# Altium PCB CtoMicroOTG.X1.PcbDoc
Units mm, origin at the board's own origin, x right, y up, seen from the top; angles counter-clockwise.
Board outline 26.75 x 25.4 mm, 2 copper layers (Top Layer, Bottom Layer), stack 0.427 mm thick; 3 components, 5 nets, 44 pads, 2 vias.
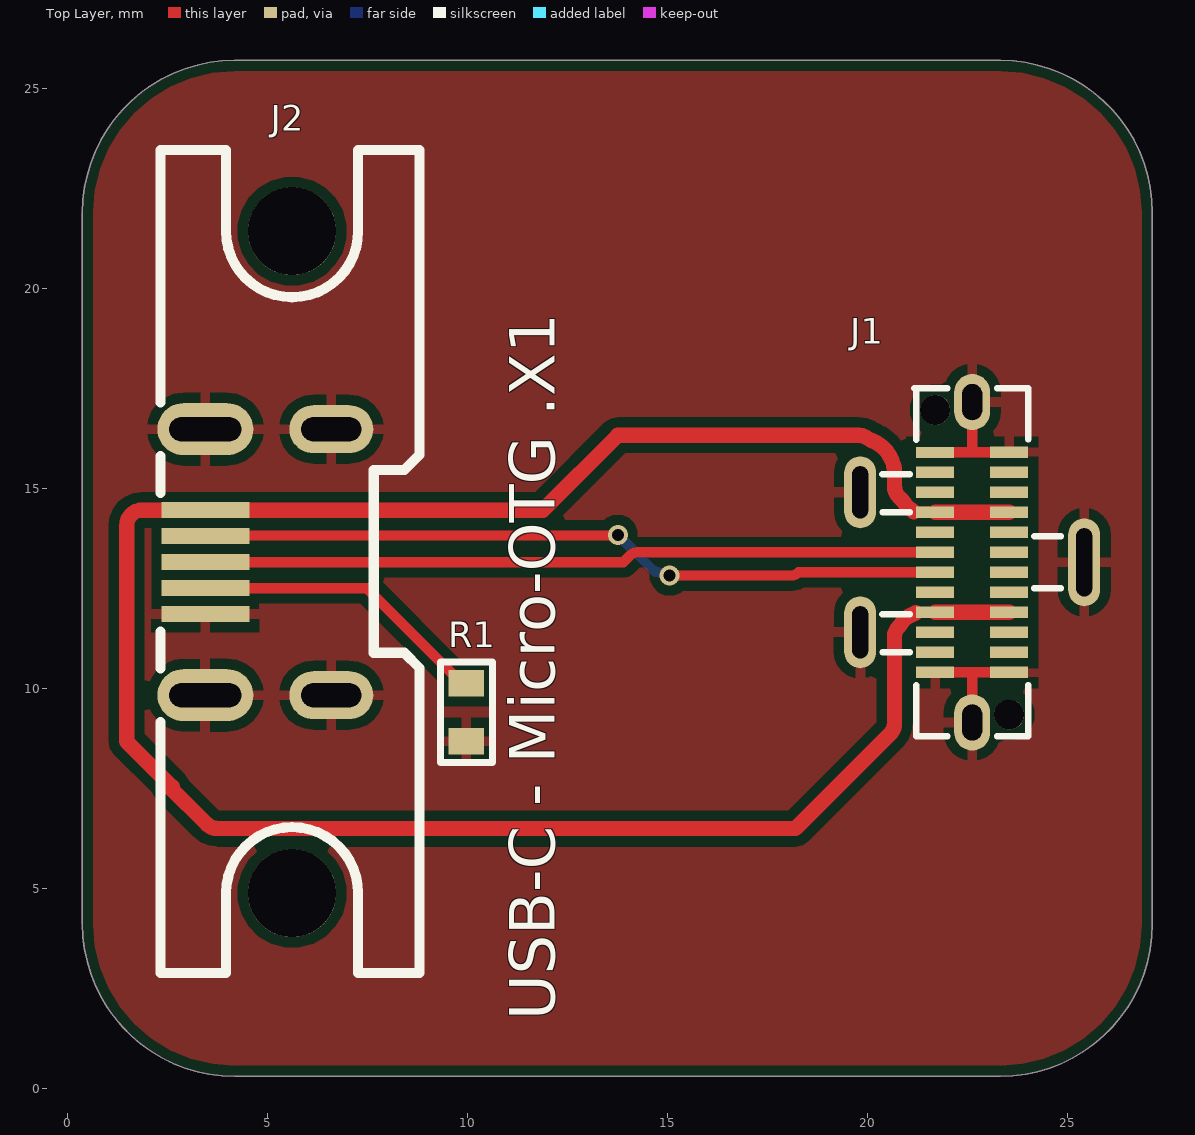
[diagram p0: Top Layer view]
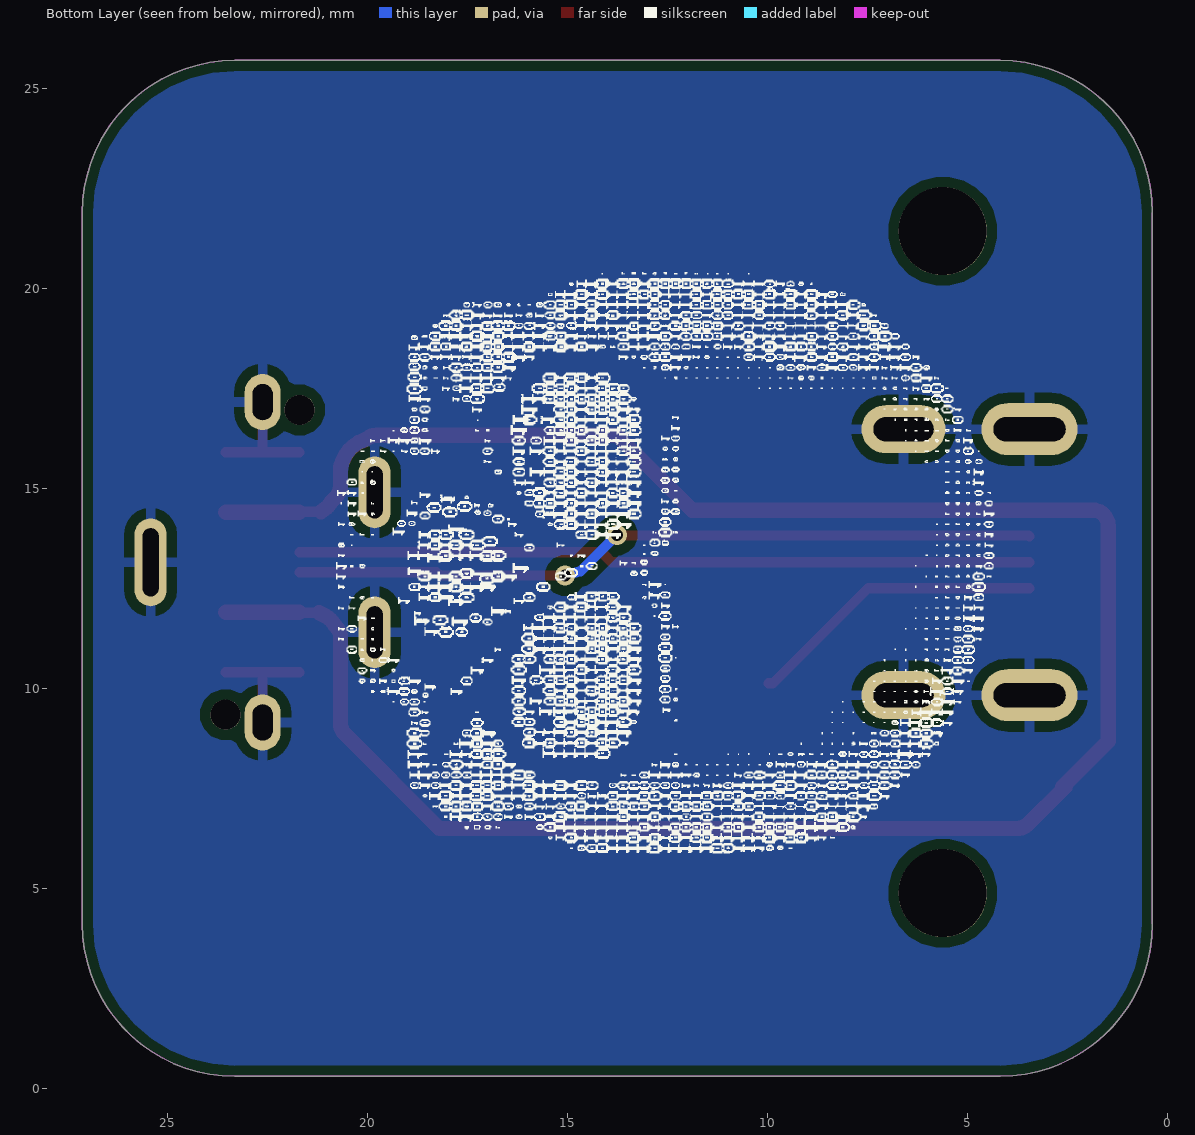
[diagram p1: Bottom Layer view, seen from below]

## Layer stack, top to bottom
Top Solder: solder mask 0.0102, Solder Resist, Dk 3.5
Top Layer: signal copper 0.0356
Dielectric 1: core 0.3556, Core-025, Dk 4.7
Bottom Layer: signal copper 0.0356
Bottom Solder: solder mask 0.0102, Solder Resist, Dk 3.5

## Board outline
0.381,4.115 0.381,21.895 cw(c4.191,21.895) 4.191,25.705 23.323,25.705 cw(c23.323,21.895) 27.133,21.895 27.133,4.115 cw(c23.323,4.115) 23.323,0.305 4.191,0.305 cw(c4.191,4.115)

## Design rules (kind name [scope] priority, off if disabled: settings)
Clearance Clearance_DiffPairs [InDifferentialPairClass('All Differential Pairs')] p1: gap=0.102 ignorepadtopadclearanceinfootprint=FALSE except(0.508: Arc-Fill Arc-Poly Arc-Region Track-Fill Track-Poly Track-Region SMDPad-Fill SMDPad-Poly SMDPad-Region THPad-Fill THPad-Poly THPad-Region Via-Fill Via-Poly Via-Region Fill-Fill Fill-Poly Fill-Region Poly-Poly Poly-Region Region-Region)
Clearance [All] p2: gap=0.254 ignorepadtopadclearanceinfootprint=FALSE except(0: Arc-Hole Track-Hole SMDPad-Hole THPad-Hole Via-Hole Fill-Hole Poly-Hole Region-Hole Text-Hole; 0.127: Arc-SMDPad Track-SMDPad SMDPad-SMDPad; 0.178: Arc-Arc Arc-Track Track-Track; 0.203: Arc-Via Track-Via SMDPad-Via THPad-Via Via-Via)
DiffPairsRouting [InDifferentialPairClass('All Differential Pairs')] p1: maxlimit=0.127 minlimit=0.127 mostfreqgap=0.127 toplayer_minwidth=0.203 toplayer_maxwidth=0.381 toplayer_prefwidth=0.254 bottomlayer_minwidth=0.203 bottomlayer_maxwidth=0.381 bottomlayer_prefwidth=0.254 maxuncoupledlength=12.7
MatchedLengths [All] p1: tolerance=0.254 checknetsindiffpair=TRUE checkdiffpairvsdiffpair=FALSE checkxsignals=FALSE checkothers=FALSE
PolygonConnect [All] p1: thpad.connectstyle=Relief thpad.reliefconductorwidth=0.254 thpad.reliefentries=4 thpad.polygonreliefangle="90 Angle" thpad.airgapwidth=0.254 smdpad.connectstyle=Relief smdpad.reliefconductorwidth=0.254 smdpad.reliefentries=4 smdpad.polygonreliefangle="90 Angle" smdpad.airgapwidth=0.254 via.connectstyle=Direct via.reliefconductorwidth=0.254 via.reliefentries=4 via.polygonreliefangle="90 Angle" via.airgapwidth=0.254
RoutingVias [All] p1: holewidth=0.203 width=0.406 viastyle="Through Hole" minholewidth=0.203 minwidth=0.406 maxholewidth=5.08 maxwidth=1.27
SilkToSilkClearance [All] p1: silktosilkclearance=0.127
SilkToSolderMaskClearance [IsPad] p1: minsilkscreentomaskgap=0.025 clearancetoexposedcopper=TRUE
SolderMaskExpansion [All] p1: expansion=0.102 istentingtop=FALSE
Width [All] p1: maxlimit=1.524 minlimit=0.226 preferedwidth=0.254 minimp=50.000000 maximp=50.000000 favimp=50.000000
27 further rules are at their usual default settings.

## Components (designator, comment, footprint, x,y, rotation, side; value= is the part's Value field where it differs from the comment)
J1 "3A 1 Brick nogging USB-C male" USB-309GD 22.627,13.157 r180 top
J2 "SMD MicroUSB-Male" ZX80-B-5SA(30) 5.029,13.16 r270 top
R1 "Generic Resistor" 0603 9.982,10.135 r270 top value=0

## Footprints (in the part's own frame and the unit in brackets; to place one, negate y for a bottom-side part, rotate by r counter-clockwise, add the part's x,y. Pads: shape width x height; smd on the part's side, far side on the other; paste and mask are expansions set on the pad)
0603 [mil] "Common Chip Resistor 0603 (1608 Metric)"
  rect 26x35 smd: 1(0,0) 2(57,0)
  silkscreen extent -21,-26 78,26, body extent -2,-16 59,16, height 17
USB-309GD [mm] "Brick nogging USB-C male"
  rect 0.95x0.28 smd paste-100 mask+0.051: A1(0.925,-2.748) A2(0.925,-2.25) A3(0.925,-1.75) A4(0.925,-1.25) A5(0.925,-0.75) A6(0.925,-0.25) A7(0.925,0.25) A8(0.925,0.75) A9(0.925,1.25) A10(0.925,1.75) A11(0.925,2.25) A12(0.925,2.75) B1(-0.925,2.75) B2(-0.925,2.25) B3(-0.925,1.75) B4(-0.925,1.25) B5(-0.925,0.75) B6(-0.925,0.25) B7(-0.925,-0.25) B8(-0.925,-0.75) B9(-0.925,-1.25) B10(-0.925,-1.75) B11(-0.925,-2.25) B12(-0.925,-2.75)
  oval 0.9x1.4 hole 0.5 slot 0.9 at 90 deg paste+0 mask+0.051: G1(0,-4.005) G3(0,4.005)
  oval 0.8x2.2 hole 0.4 slot 1.7 at 90 deg paste+0 mask+0.051: G2(-2.8,0)
  oval 0.8x1.8 hole 0.4 slot 1.3 at 90 deg paste+0 mask+0.051: G4(2.8,1.75) G5(2.8,-1.75)
  round 0.75 hole 0.75 unplated paste+0: ""(-0.925,3.81) ""(0.925,-3.81)
  silkscreen extent -2.22,-4.35 2.25,4.35
ZX80-B-5SA(30) [mm] "USB 2.0 1 5P Male -30?~+85? Micro-B Male SMD"
  rect 0.4x2.2 smd paste-100 mask+0.05: 1(-1.3,-1.575) 2(-0.65,-1.575) 3(0,-1.575) 4(0.65,-1.575) 5(1.3,-1.575)
  oval 1.3x2.4 hole 0.6 slot 1.8 at 90 deg paste+0 mask+0.051: 6(3.325,-1.575) 7(-3.325,-1.575)
  oval 1.2x2.1 hole 0.6 slot 1.5 at 90 deg paste+0 mask+0.051: 8(-3.325,1.575) 9(3.325,1.575)
  round 2.2 hole 2.2 unplated paste+0: ""(-8.275,0.595) ""(8.275,0.595)
  silkscreen extent -10.31,-2.7 10.27,3.78, body extent -10.28,-2.48 10.28,3.82, height 13

## Part data
J1: library part USB-309GD, "3A 1 Brick nogging 24P male -20℃~+60℃ Type-C SMD USB Connector", LCSC PN=C309337
J2: library part ZX80-B-5SA(30), "USB 2.0 1 5P Male -30℃~+85℃ Micro-B SMD USB Connector", LCSC PN=C598212
R1: Power=1/10W

## Via types
v1: diameter 0.5, hole 0.3, Top Layer to Bottom Layer, 2 vias

## Nets (pads, with @x,y where several pads share a name; then routed paths per layer and width w, separated by ;. In a path a pad name is that pad's centre, name@x,y a point inside that pad or via, vN(x,y) a via of type N, cw(c..) or ccw(c..) an arc to the next point about the centre after c; other vN are vias at no path point)
DN: J1.A7 J2.2 | length 18.7
  Top Layer w0.254: J2.2 3.471,13.826 13.75,13.826 v1(13.767,13.843) ; v1(15.062,12.827) 18.101,12.827 ccw(c18.101,13.081) 18.281,12.902 18.286,12.907 J1.A7
  Bottom Layer w0.254: v1(13.767,13.843) 14.685,12.925 cw(c14.685,12.671) 14.755,12.915 v1(15.062,12.827)
DP: J1.A6 J2.3 | length 18.3
  Top Layer w0.254: J2.3 13.904,13.16 14.077,13.333 cw(c14.257,13.153) 14.257,13.407 21.367,13.407 J1.A6
GND: J1.A1 J1.A12 J1.B1 J1.B12 J1.G1 J1.G2 J1.G3 J1.G4 J1.G5 J2.5 J2.6 J2.7 J2.8 J2.9 R1.2 | length 6.2
  Top Layer w0.254: J1.A1 21.702,15.907 22.627,15.907 ; J1.A12 22.627,10.407 ; J1.G3 22.627,10.407 ; J1.G1 22.627,15.907 ; J1.B1@23.552,10.407 22.627,10.407 ; J1.B12 22.627,15.907
NetJ2_4: J2.4 R1.1 | length 7.5
  Top Layer w0.254: J2.4 7.493,12.51 9.868,10.135 R1.1
VCC: J1.A4 J1.A9 J1.B4 J1.B9 J2.1 | length 56.4
  Top Layer w0.254: 21.165,14.42 21.689,14.42 J1.A4 ; 21.215,11.894 21.689,11.894 J1.A9 ; J1.B4 J1.B4@23.565,11.92 ; J1.B9 J1.B9@23.565,14.394
  Top Layer w0.381: 3.759,6.502 cw(c3.76,6.883) 3.491,6.614 2.561,7.544 2.625,7.544 1.489,8.68 1.489,14.079 cw(c1.87,14.079) 1.87,14.46 J2.1 11.894,14.46 13.767,16.332 19.784,16.332 cw(c19.784,15.951) 19.983,16.276 20.06,16.229 ccw(c20.259,16.554) 20.123,16.198 cw(c19.827,15.407) 20.62,15.699 20.659,15.591 cw(c20.302,15.459) 20.683,15.459 20.683,15.06 ccw(c21.064,15.06) 20.794,14.791 20.883,14.702 cw(c20.614,14.432) 20.949,14.615 ccw(c21.227,14.767) 21.075,14.488 cw(c20.892,14.154) 21.161,14.424 21.165,14.42 ; 3.76,6.502 18.212,6.502 20.571,8.862 ccw(c20.302,9.131) 20.683,9.131 20.683,11.348 cw(c21.056,11.27) 20.786,11.539 20.794,11.547 ccw(c20.524,11.816) 20.857,11.632 cw(c21.19,11.447) 20.981,11.765 21.043,11.806 ccw(c20.833,12.124) 21.046,11.808 21.052,11.812 cw(c21.227,11.547) 21.124,11.847 ccw(c20.997,12.207) 21.215,11.894 ; J1.A9 J1.B4@23.552,11.907 ; J1.A4 J1.B9@23.552,14.407
pads on no net: J1. J1.A2 J1.A3 J1.A5 J1.A8 J1.A10 J1.A11 J1.B2 J1.B3 J1.B5 J1.B6 J1.B7 J1.B8 J1.B10 J1.B11 J2.

## Polygon pours and split planes (outlines as drawn)
GND on Bottom Layer "GND_L02_P001" (solid, pour order 1): 0.412,21.926 cw(c4.158,21.926) 4.158,25.672 23.356,25.672 cw(c23.356,21.895) 27.133,21.895 27.133,4.115 cw(c23.323,4.115) 23.323,0.305 4.191,0.305 cw(c4.191,4.115) 0.381,4.115 0.381,8.899
GND on Top Layer "GND_L01_P000" (solid, pour order 0): 0.412,21.926 cw(c4.158,21.926) 4.158,25.672 23.356,25.672 cw(c23.356,21.895) 27.133,21.895 27.133,4.115 cw(c23.323,4.115) 23.323,0.305 4.191,0.305 cw(c4.191,4.115) 0.381,4.115 0.381,8.899

## Keep-outs
Keep-Out Layer:
  the board outline again, w0.025

## Silkscreen, mask and mechanical layers (free items; w line width, h text height)
Top Overlay:
  text "USB-C - Micro-OTG .X1" at 12.192,1.702 h1.14 r90
Bottom Overlay:
  drawing of 1384 lines, arcs and shapes, not listed
Mechanical 1:
  the board outline again, w0.254

## Dimensions
5.624,21.435 to 22.627,17.162 on Board Notes